# Altium PCB 8SoundsUSB-MIC.PcbDoc
Units mm, origin at the board's own origin, x right, y up, seen from the top; angles counter-clockwise.
Board outline 25.4 x 23.4 mm, 2 copper layers (Top Layer, Bottom Layer); 22 components, 16 nets, 68 pads, 18 vias.
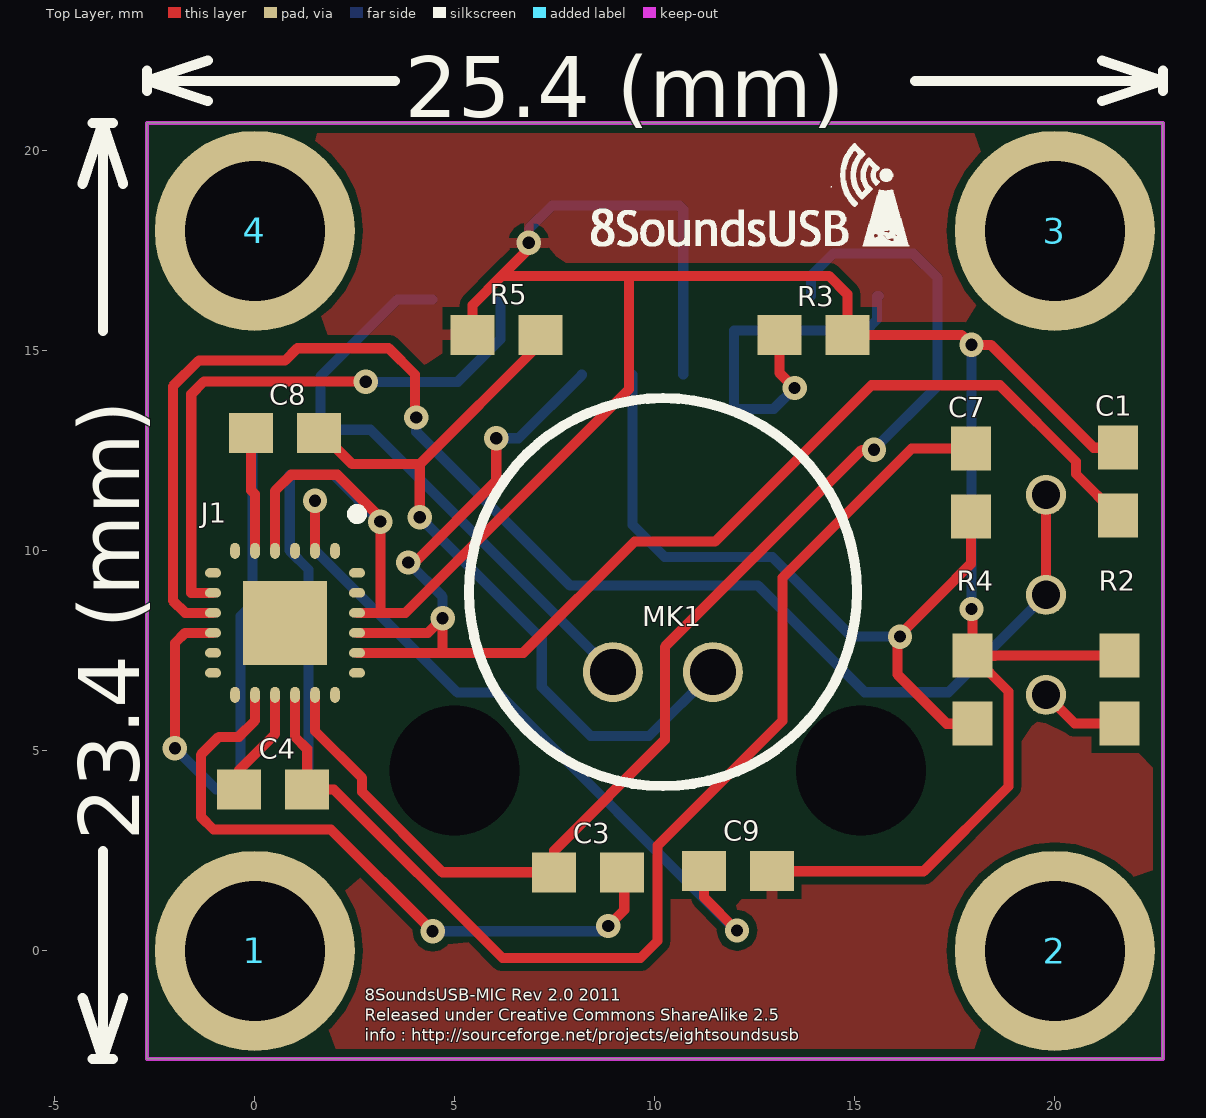
[diagram p0: Top Layer view]
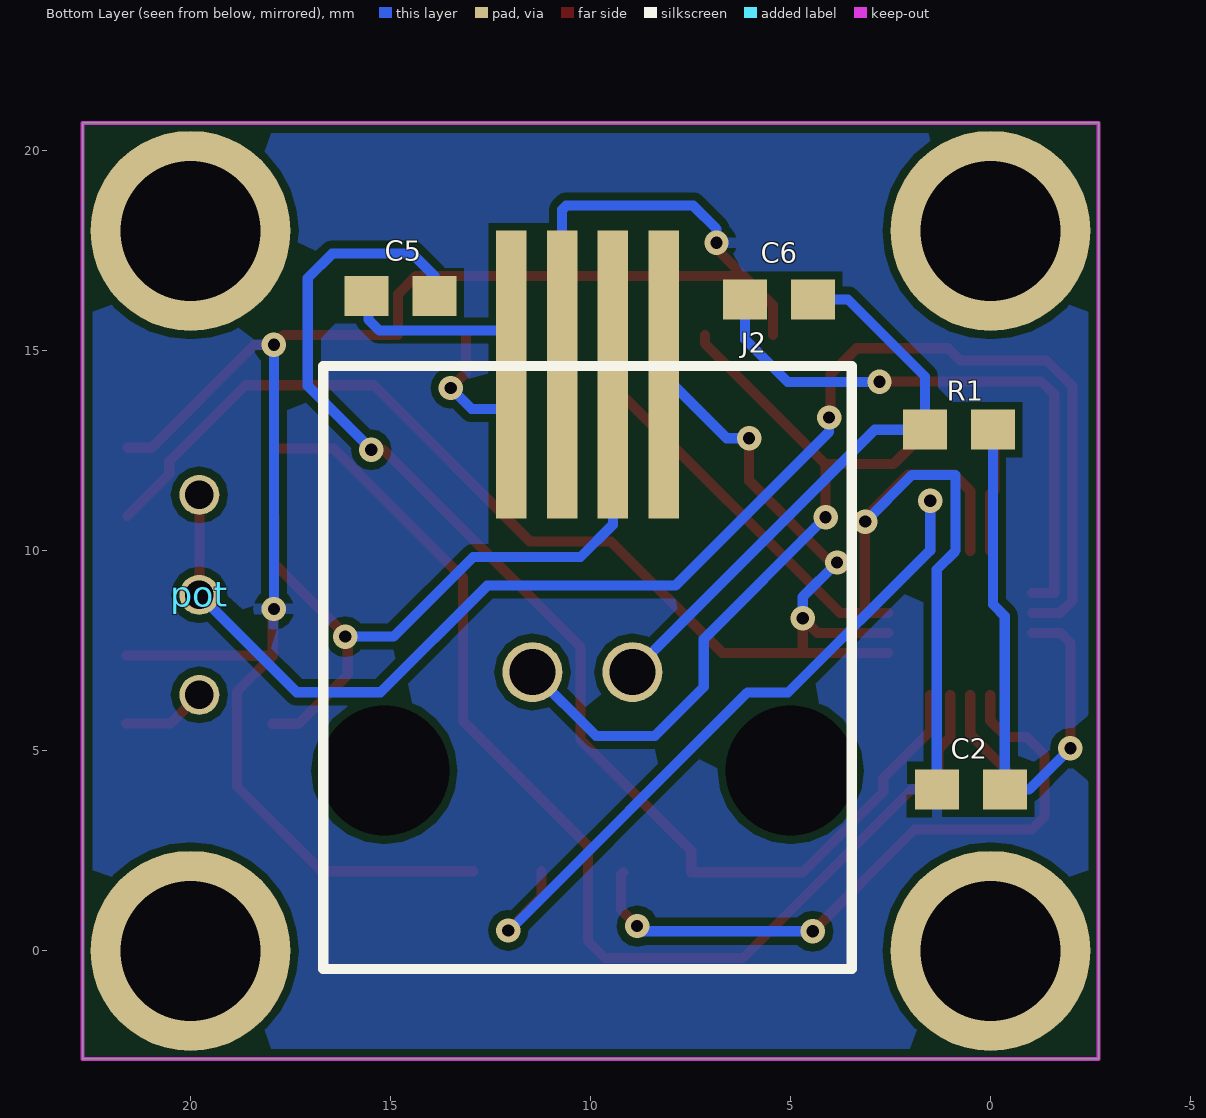
[diagram p1: Bottom Layer view, seen from below]
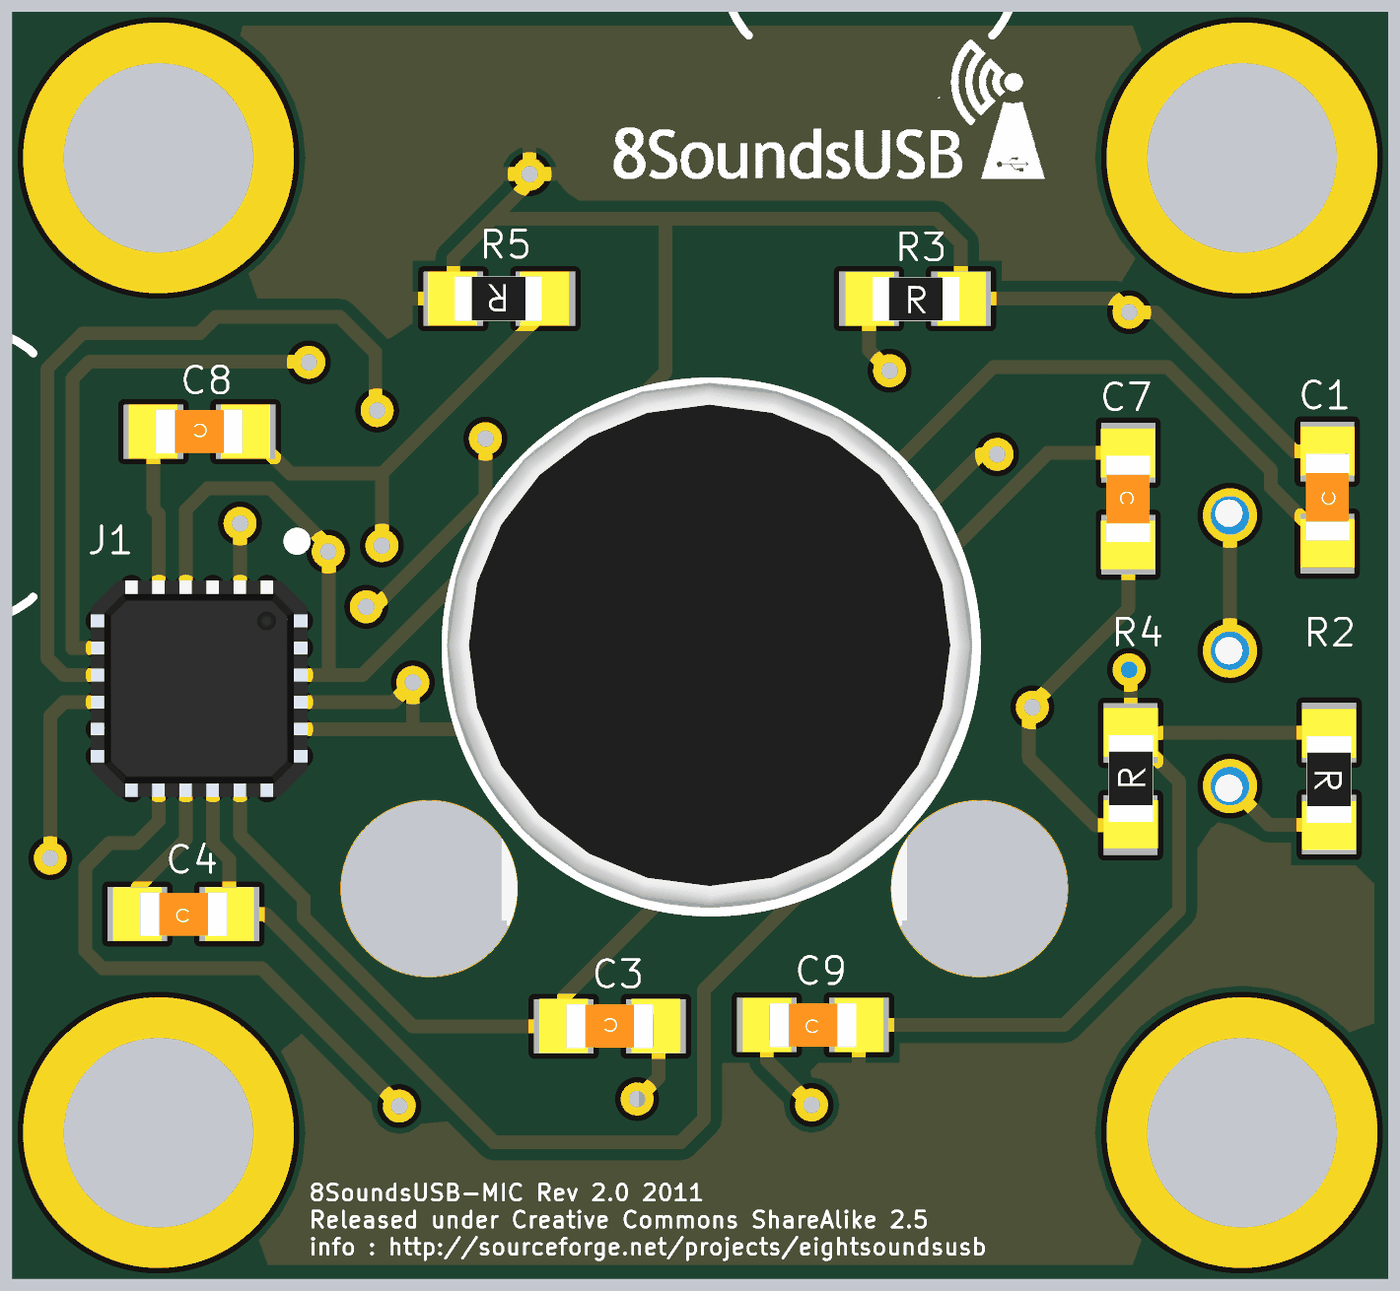
[diagram p2: 3D render of the assembled board from above, using the file's embedded part models]
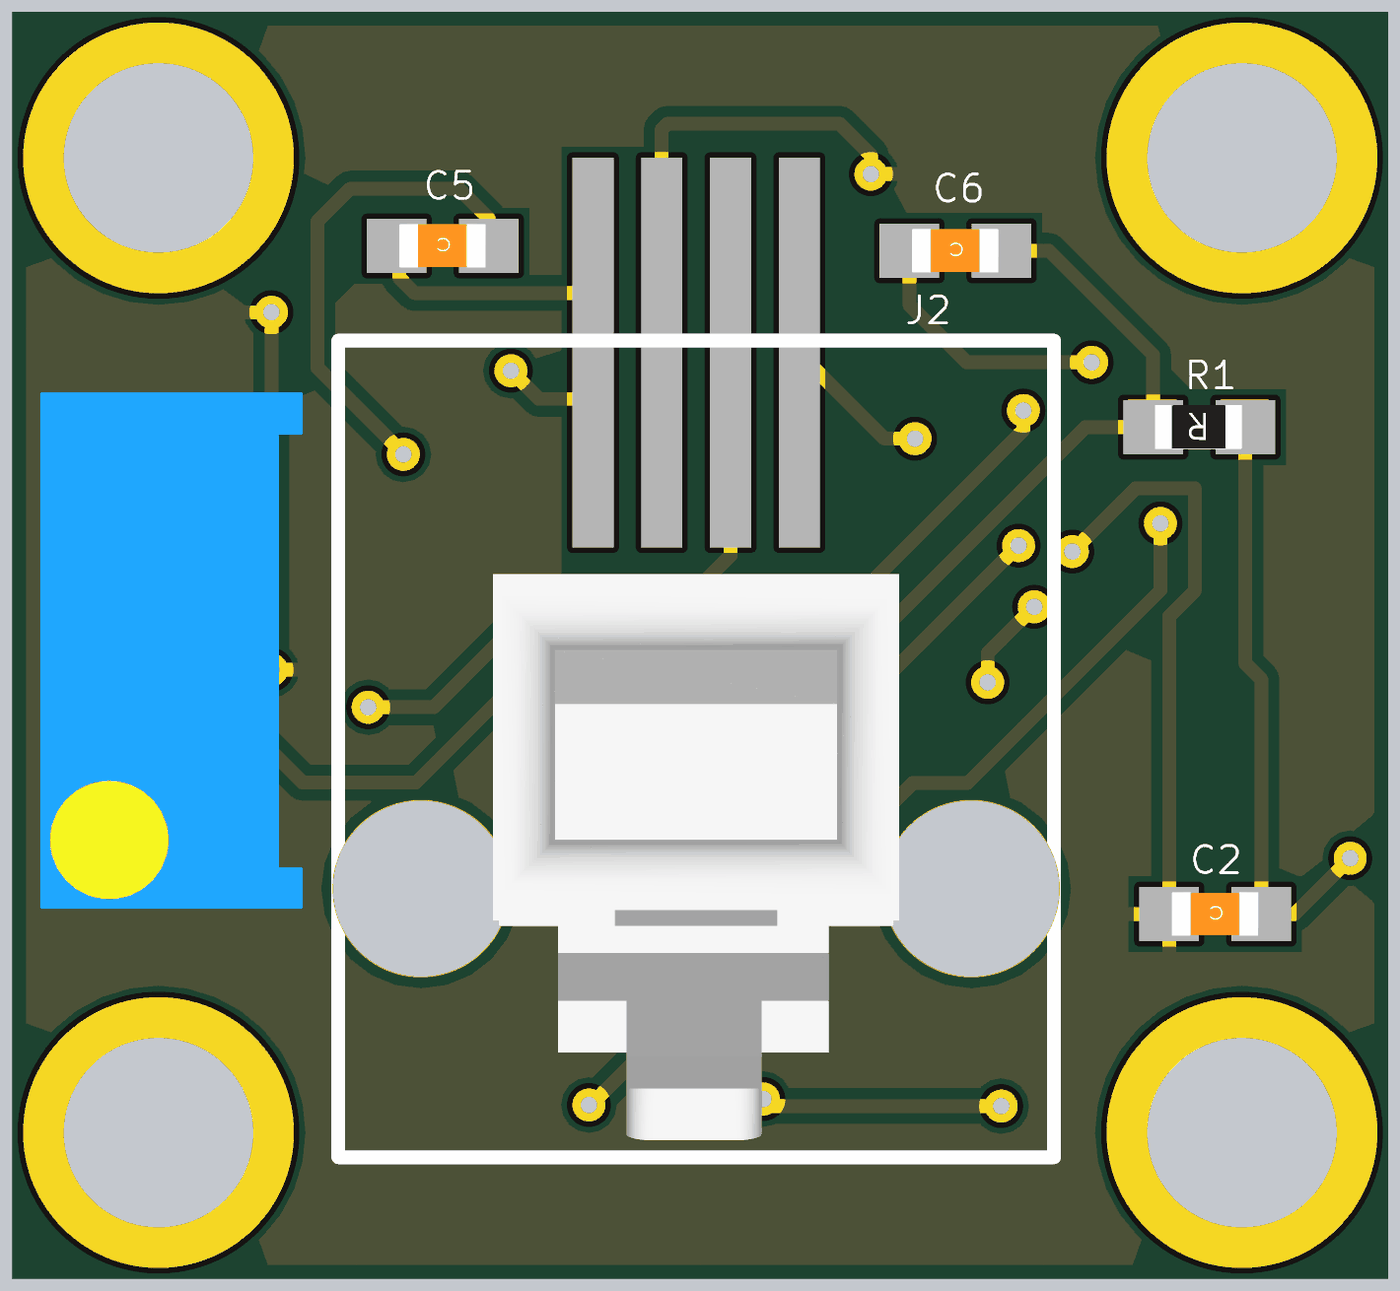
[diagram p3: 3D render of the assembled board from below, using the file's embedded part models]

## Layer stack, top to bottom
Top Layer: signal copper 0.0356
Dielectric: dielectric 0.32, FR-4, Dk 4.8
Bottom Layer: signal copper 0.0356

## Board outline
-2.7,20.7 -2.7,-2.7 22.7,-2.7 22.7,20.7

## Design rules (kind name [scope] priority, off if disabled: settings)
Clearance [All] p1: gap=0.2
PlaneConnect [All] p1: planeconnectstyle=Direct reliefexpansion=0.508 reliefentries=4 reliefconductorwidth=0.254 reliefairgap=0.254
PolygonConnect [All] p1: connectstyle=Relief reliefconductorwidth=0.254 reliefentries=4 polygonreliefangle="90 Angle"
RoutingPriority [InNet('GND')] p1: routingpriority=1
RoutingVias [All] p1: holewidth=0.305 width=0.61 viastyle="Through Hole" minholewidth=0.305 minwidth=0.61 maxholewidth=1.27 maxwidth=2.54
SilkscreenOverComponentPads [All] p1: minsilkscreentomaskgap=0.254
SolderMaskExpansion [All] p1: expansion=0.102
Width [All] p1: maxlimit=0.254 minlimit=0.254 preferedwidth=0.254
25 further rules are at their usual default settings.

## Classes and differential pairs
component class 8SoundsUSB-MIC: C1 C2 C3 C4 C5 C6 C7 C8 C9 J1 J2 MK1 pot R1 R2 R3 R4 R5

## Components (designator, comment, footprint, x,y, rotation, side; value= is the part's Value field where it differs from the comment)
1 "PTH-M3" "Mounting Hole"#1 0.157,1.397 r0 top (schematic designator MTH1)
2 "PTH-M3" "Mounting Hole"#2 20.357,1.407 r0 top (schematic designator MTH1)
3 "PTH-M3" "Mounting Hole"#3 20.39,18.799 r0 top (schematic designator MTH1)
4 "PTH-M3" "Mounting Hole"#4 0.16,18.904 r0 top (schematic designator MTH1)
C1 "Cap" C0603 21.537,11.742 r90 top
C2 "Cap" C0603 0.507,3.997 r0 bottom
C3 "Cap" C0603 8.317,1.927 r180 top
C4 "Cap" C0603 0.472,4.072 r0 top
C5 "Cap" C0603 14.767,16.337 r0 bottom
C6 "Cap" C0603 5.302,16.247 r0 bottom
C7 "Cap" C0603 17.937,11.692 r270 top
C8 "Cap" C0603 0.742,12.907 r180 top
C9 "Cap" C0603 12.092,2.027 r0 top
J1 "TS472" TS472 0.755,8.2 r270 top
J2 "RJ-11-MIC" "RJ11 Micro" 10.076,4.505 r180 bottom
MK1 "Mic2" Mic 10.203,6.969 r180 top
pot "" CT-94 19.779,8.899 r90 bottom
R1 "Res1" R0603 0.802,12.992 r0 bottom
R2 "Res2" R0603 21.647,6.522 r270 top
R3 "Res1" R0603 13.977,15.437 r0 top
R4 "Res1" R0603 17.907,6.542 r90 top
R5 "Res1" R0603 6.277,15.362 r180 top

## Footprints (in the part's own frame and the unit in brackets; to place one, negate y for a bottom-side part, rotate by r counter-clockwise, add the part's x,y. Pads: shape width x height; smd on the part's side, far side on the other; paste and mask are expansions set on the pad)
C0603 [mm]
  rect 1.1x1 smd: 1(-0.864,-0.037) 2(0.836,-0.037)
  body extent -1.31,-0.54 1.29,0.46, height 0.89
CT-94 [mm]
  round 1 hole 0.711: 1(-2.5,0) 2(0,0) 3(2.5,0)
  body extent -4.76,-2.43 4.76,2.4, height 11.55
Mic [mm]
  round 1.5 hole 1.15: 1(-1.25,0) 2(1.25,0)
  silkscreen extent -4.85,-6.85 4.85,2.85, body extent -4.82,-6.88 4.88,2.82, height 5.38
"Mounting Hole"#1 [mm]
  round 5 hole 3.5: Hole(-0.157,-1.397)
"Mounting Hole"#2 [mm]
  round 5 hole 3.5: Hole(-0.357,-1.407)
"Mounting Hole"#3 [mm]
  round 5 hole 3.5: Hole(-0.39,-0.799)
"Mounting Hole"#4 [mm]
  round 5 hole 3.5: Hole(-0.16,-0.904)
R0603 [mm]
  rect 1.1x1 smd: 1(-0.864,-0.037) 2(0.836,-0.037)
  body extent -1.3,-0.54 1.3,0.46, height 0.53
"RJ11 Micro" [mm]
  rect 0.76x7.2 smd: 1(-1.905,9.9) 2(-0.635,9.9) 3(0.635,9.9) 4(1.905,9.9)
  round 0 hole 3.25: ""(-5.08,0) ""(5.08,0)
  silkscreen extent -6.6,-4.96 6.61,10.12, body extent -6.7,-4.97 6.7,10.09, height 15.7
TS472 [mm]
  oval 0.4x0.24 smd: 1(-1.8,1.25) 2(-1.8,0.75) 3(-1.8,0.25) 4(-1.8,-0.25) 5(-1.8,-0.75) 6(-1.8,-1.25) 13(1.8,-1.25) 14(1.8,-0.75) 15(1.8,-0.25) 16(1.8,0.25) 17(1.8,0.75) 18(1.8,1.25)
  oval 0.24x0.4 smd: 7(-1.25,-1.8) 8(-0.75,-1.8) 9(-0.25,-1.8) 10(0.25,-1.8) 11(0.75,-1.8) 12(1.25,-1.8) 19(1.25,1.8) 20(0.75,1.8) 21(0.25,1.8) 22(-0.25,1.8) 23(-0.75,1.8) 24(-1.25,1.8)
  rect 2.1x2.1 smd: ""(0,0)
  silkscreen extent -2.85,1.68 -2.6,1.93, body extent -2,-2.01 2,1.99, height 0.83

## Part data
1 2 3 4: library part MountingHole
C1 C2 C3 C4 C5 C6 C7 C8 C9: "Capacitor"
MK1: "Microphone"
pot: library part CT-94
R1 R3 R4 R5: "Resistor"
R2: library part Res1, "Resistor"

## Via types
v1: diameter 0.61, hole 0.305, Top Layer to Bottom Layer, 18 vias

## Nets (pads, with @x,y where several pads share a name; then routed paths per layer and width w, separated by ;. In a path a pad name is that pad's centre, name@x,y a point inside that pad or via, vN(x,y) a via of type N, cw(c..) or ccw(c..) an arc to the next point about the centre after c; other vN are vias at no path point)
GND: C1.2 C2.2 C9.2 J1.4 J1.22 J2.2 R2.1 R3.2 R4.2 R5.2 | length 81.7
  Top Layer w0.254: J1.4 0.505,11.5 0.907,11.902 2.058,11.902 3.145,10.815 3.145,8.45 ; J1.22 3.145,8.45 ; R5.2 5.441,16.141 6.175,16.875 ; v1(6.85,17.7) 6.85,17.55 6.175,16.875 ; C9.2 16.719,1.99 18.84,4.11 18.84,6.483 R4.2 ; v1(17.916,8.546) 17.944,8.518 R4.2 ; 18.5,7.378 R4.2 ; 19.6,7.386 R4.2 ; 19.664,7.386 R2.1 ; C1.2 20.972,12.578 18.4,15.15 v1(17.916,15.15) 17.666,15.4 R3.2 14.813,16.417 14.355,16.875 9.355,16.875 ; 3.145,8.45 3.765,8.45 9.355,14.04 9.355,16.875 ; 6.175,16.875 9.355,16.875
  Bottom Layer w0.254: C2.2 1.343,9.535 0.872,10.006 0.872,11.899 1.965,11.899 v1(3.133,10.731) ; v1@7.013,17.7 v1(6.85,17.7) 6.85,18.05 7.43,18.63 10.609,18.63 10.711,18.528 J2.2 ; v1(17.916,8.546) v1(17.916,15.15)
NetC1_1: C1.1 J1.20 J1.21 J2.4 | length 35.1
  Top Layer w0.254: J1.20 4.7,7.45 ; J1.21 4.33,7.95 v1(4.695,8.315) 4.695,7.455 4.7,7.45 ; v1(3.835,9.71) 3.995,9.71 6.035,11.75 v1(6.035,12.815) ; C1.1 20.53,11.922 20.53,12.235 18.625,14.14 15.415,14.14 11.505,10.23 9.49,10.23 6.71,7.45 4.7,7.45
  Bottom Layer w0.254: v1(3.835,9.71) 4.695,8.85 v1(4.695,8.315) ; v1(6.035,12.815) 6.593,12.815 8.171,14.393 J2.4
NetC2_1: C2.1 J1.10 R1.1 | length 14.9
  Top Layer w0.254: v1(-1.998,5.066) -1.998,7.696 -1.744,7.95 J1.10
  Bottom Layer w0.254: v1(-1.998,5.066) -0.966,4.034 C2.1 -0.357,8.368 -0.062,8.663 R1.1
NetC3_1: C3.1 J1.14 | length 16.9
  Top Layer w0.254: J1.14 0.005,5.755 -0.4,5.35 -0.9,5.35 -1.35,4.9 -1.35,3.352 -1.033,3.034 1.901,3.034 v1(4.445,0.49) ; v1(8.835,0.62) 9.235,1.02 9.235,1.91 C3.1
  Bottom Layer w0.254: v1(4.445,0.49) 8.705,0.49 v1(8.835,0.62)
NetC3_2: C3.2 C5.1 J1.17 | length 31.7
  Top Layer w0.254: J1.17 1.505,5.498 2.682,4.321 2.682,3.97 4.688,1.964 C3.2 7.481,2.506 10.25,5.275 10.25,7.6 15.175,12.525 15.468,12.525 v1(15.48,12.525)
  Bottom Layer w0.254: C5.1 13.903,16.878 14.455,17.43 16.46,17.43 17.07,16.82 17.07,14.127 15.48,12.537 v1(15.48,12.525)
NetC4_1: C4.1 J1.15 | length 2.7
  Top Layer w0.254: C4.1 -0.392,4.522 0.505,5.419 J1.15
NetC4_2: C4.2 C7.1 J1.16 | length 29.6
  Top Layer w0.254: J1.16 1.005,5.344 1.308,5.041 C4.2 1.975,4.035 6.19,-0.18 9.64,-0.18 10.067,0.247 10.067,2.628 13.191,5.752 13.191,9.33 16.417,12.556 C7.1
NetC5_2: C5.2 J2.1 R3.1 | length 9.5
  Top Layer w0.254: R3.1 13.113,14.452 v1(13.495,14.07)
  Bottom Layer w0.254: v1(13.495,14.07) 12.975,13.55 12.734,13.55 11.981,13.55 J2.1 11.981,15.506 15.274,15.506 15.554,15.785 15.554,16.374 C5.2
NetC6_1: C6.1 MK1.2 R1.2 | length 14.8
  Bottom Layer w0.254: C6.1 3.564,16.284 1.638,14.358 R1.2 2.892,13.029 MK1.2
NetC6_2: C6.2 J1.8 | length 14.8
  Top Layer w0.254: J1.8 -1.591,8.95 -1.591,13.919 -1.275,14.235 v1@2.775,14.235
  Bottom Layer w0.254: v1(2.775,14.225) 5.075,14.225 6.138,15.288 C6.2
NetC7_2: C7.2 J2.3 R4.1 | length 18.7
  Top Layer w0.254: C7.2 17.9,9.675 17.103,8.877 16.13,7.905 v1(16.13,7.855) 16.069,7.794 16.069,6.906 17.297,5.678 R4.1
  Bottom Layer w0.254: J2.3 9.441,10.654 10.249,9.846 12.935,9.846 14.926,7.855 v1(16.13,7.855)
NetC8_1: C8.1 MK1.1 R5.1 | length 19.6
  Top Layer w0.254: C8.1 1.658,12.944 2.435,12.167 4.124,12.167 ; v1(4.124,10.84) 4.124,12.167 ; R5.1 7.141,15.185 4.124,12.167
  Bottom Layer w0.254: v1(4.124,10.84) 7.171,7.792 7.171,6.596 8.396,5.371 9.027,5.371 9.855,5.371 MK1.1
NetC8_2: C8.2 J1.5 | length 3
  Top Layer w0.254: C8.2 -0.094,11.515 0.005,11.416 J1.5
NetC9_1: C9.1 J1.2 | length 18.8
  Top Layer w0.254: J1.2 v1(1.505,11.25) ; C9.1 11.228,1.337 v1(12.055,0.51)
  Bottom Layer w0.254: v1(1.505,11.25) 1.505,10.015 5.063,6.457 5.4,6.457 6.078,6.457 12.025,0.51 v1(12.055,0.51)
NetJ1_9: J1.9 pot.2 pot.3 | length 36.6
  Top Layer w0.254: J1.9 -1.744,8.45 -2.049,8.755 -2.049,14.111 -1.4,14.76 0.758,14.76 1.063,15.065 3.345,15.065 4.004,14.407 4.004,13.405 4.004,13.367 v1(4.036,13.335) ; pot.2 pot.3
  Bottom Layer w0.254: v1(4.036,13.335) 4.036,12.977 7.883,9.13 12.582,9.13 15.249,6.463 17.343,6.463 pot.2
Netpot_1: pot.1 R2.2 | length 2.1
  Top Layer w0.254: pot.1 20.492,5.686 R2.2
pads on no net: 1.Hole 2.Hole 3.Hole 4.Hole J1. J1.1 J1.3 J1.6 J1.7 J1.11 J1.12 J1.13 J1.18 J1.19 J1.23 J1.24 J2.

## Polygon pours and split planes (outlines as drawn)
GND on Top Layer "Ground-TOP" (solid, remove dead copper): -2.7,20.7 -2.7,-2.7 22.7,-2.7 22.7,20.7
GND on Bottom Layer "Ground-TOP" (solid, remove dead copper): -2.7,20.7 -2.7,-2.7 22.7,-2.7 22.7,20.7

## Keep-outs
Keep-Out Layer:
  lines w0.001: 20.7,-2.7 22.7,-2.7
  lines w0.1: -2.7,-2.7 22.7,-2.7 22.7,20.7 -2.7,20.7 -2.7,-2.7

## Silkscreen, mask and mechanical layers (free items; w line width, h text height)
Top Overlay:
  drawing of 1453 lines, arcs and shapes, not listed
  text "25.4 (mm)" at 3.754,20.836 h1.52
  text "23.4 (mm)" at -2.886,2.754 h1.52 r90
  text "8SoundsUSB-MIC Rev 2.0 2011" at 2.75,-1.25 h0.3
  text "Released under Creative Commons ShareAlike 2.5" at 2.75,-1.75 h0.3
  text "info : http://sourceforge.net/projects/eightsoundsusb" at 2.75,-2.25 h0.3